# Altium PCB base_pcb.PcbDoc
Units mil, origin at the board's own origin, x right, y up, seen from the top; angles counter-clockwise.
Board outline 6000 x 4000 mil, 2 copper layers (Top Layer, Bottom Layer); 69 components, 58 nets, 229 pads, 0 vias.
Unrouted connection lines stored in the file: 110.
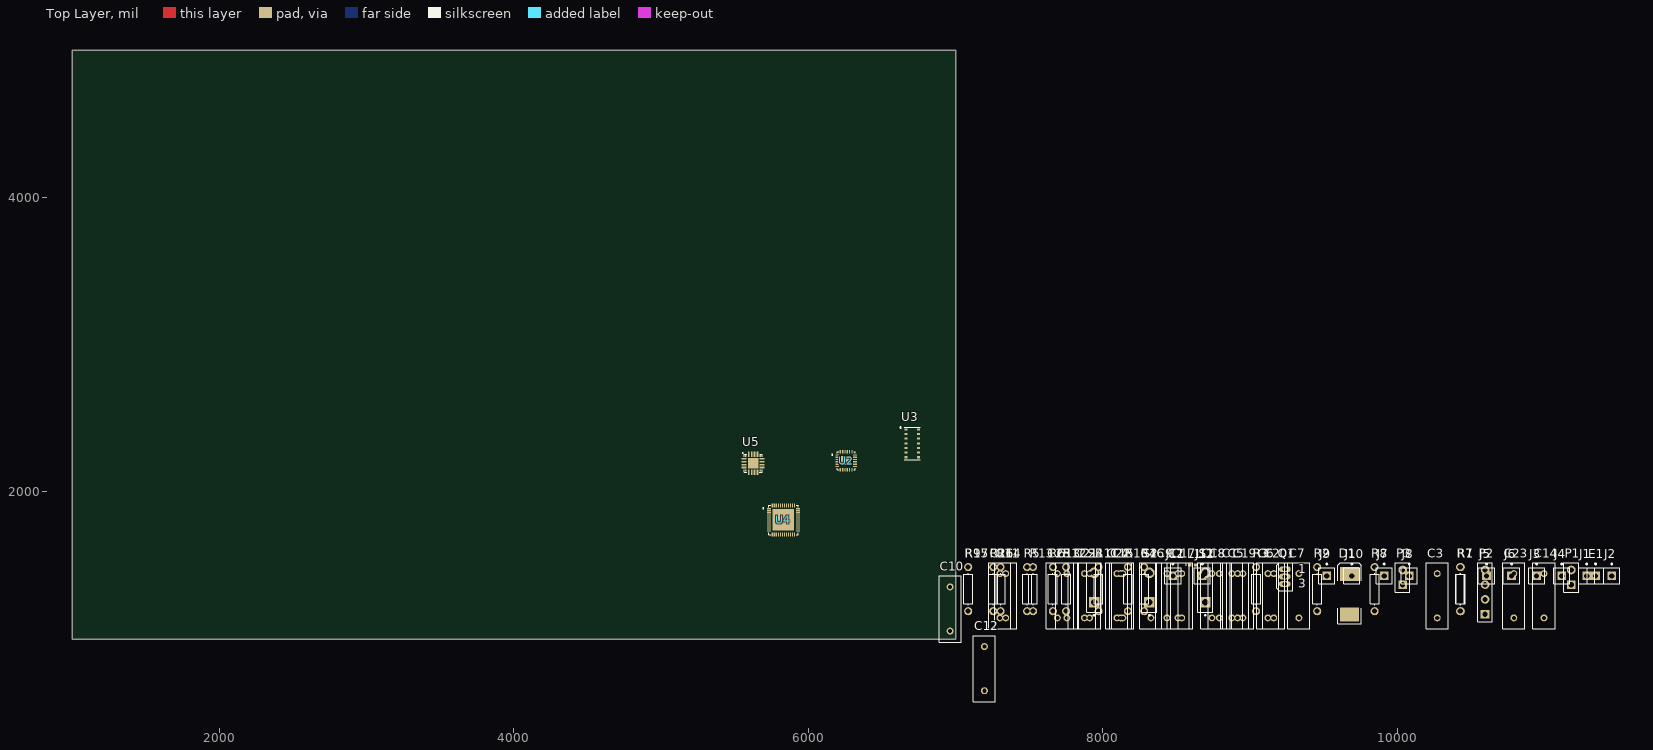
[diagram p0: Top Layer view]
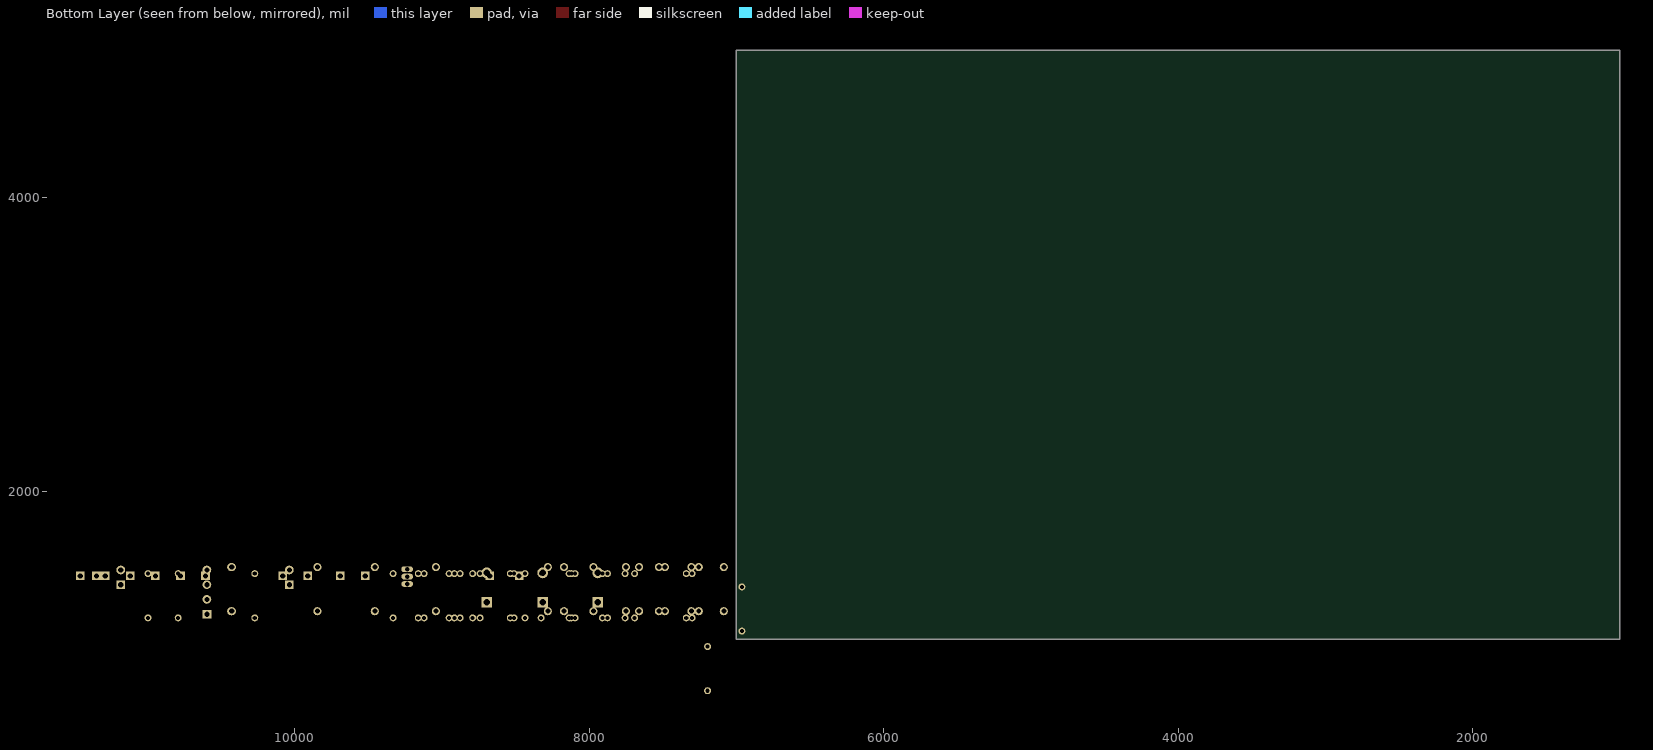
[diagram p1: Bottom Layer view, seen from below]

## Layer stack, top to bottom
Top Solder: solder mask 0.4, Solder Resist, Dk 3.5
Top Layer: signal copper 1.4
Dielectric 1: dielectric 12.6, FR-4, Dk 4.8
Bottom Layer: signal copper 1.4
Bottom Solder: solder mask 0.4, Solder Resist, Dk 3.5

## Board outline
1000,1000 7000,1000 7000,5000 1000,5000

## Design rules (kind name [scope] priority, off if disabled: settings)
Clearance [All] p1: gap=5 ignorepadtopadclearanceinfootprint=FALSE
PolygonConnect [All] p1: connectstyle=Relief reliefconductorwidth=10 reliefentries=4 polygonreliefangle="90 Angle" airgapwidth=10
RoutingVias [All] p1: holewidth=28 width=50 viastyle="Through Hole" minholewidth=28 minwidth=50 maxholewidth=28 maxwidth=50
SolderMaskExpansion [All] p1: expansion=4
Width [All] p1: maxlimit=1000 minlimit=8 preferedwidth=10
30 further rules are at their usual default settings.

## Classes and differential pairs
component class base_schematic: C1 C2 C3 C4 C5 C6 C7 C11 C12 C15 C17 C18 C20 C22 C23 C25 C26 D1 E1 J1 J2 J3 J4 J5 J6 J7 J8 J9 J10 J11 J12 L1 P1 P2 P3 Q1 R1 R2 R3 R4 R5 R6 R7 R8 R9 R12 R13 R14 R15 R16 R17 S1 S2 S3 U2 U3 U4 U5

## Components (designator, comment, footprint, x,y, rotation, side; value= is the part's Value field where it differs from the comment)
C1 "100nF" RAD-0.3 8875,1295 r90 top value=100pF
C2 "100nF" RAD-0.3 8510,1295 r90 top value=100pF
C3 "1uF" RAD-0.3 10270,1295 r90 top value=100pF
C4 "100nF" RAD-0.3 8135,1295 r90 top value=100pF
C5 "100nF" RAD-0.3 8915,1295 r90 top value=100pF
C6 "100nF" RAD-0.3 9120,1295 r90 top value=100pF
C7 "100nF" RAD-0.3 9330,1295 r90 top value=100pF
C8 "3.9pF" RAD-0.3 8790,1295 r90 top value=100pF
C9 "2.4pF" RAD-0.3 8435,1295 r90 top value=100pF
C10 "Cap" RAD-0.3 6962.31,1205 r90 top value=100pF
C11 "Cap" RAD-0.3 7340,1295 r90 top value=100pF
C12 "Cap" RAD-0.3 7195,800 r90 top value=100pF
C13 "Cap" RAD-0.3 7755,1295 r90 top value=100pF
C14 "10nF" RAD-0.3 10995,1295 r90 top value=100pF
C15 "1uF" RAD-0.3 8120,1295 r90 top value=100pF
C16 "100nF" RAD-0.3 8325,1295 r90 top value=100pF
C17 "100nF" RAD-0.3 8535,1295 r90 top value=100pF
C18 "100nF" RAD-0.3 8740,1295 r90 top value=100pF
C19 "100nF" RAD-0.3 8950,1295 r90 top value=100pF
C20 "1uF" RAD-0.3 9160,1295 r90 top value=100pF
C21 "10uF" RAD-0.3 7875,1295 r90 top value=100pF
C22 "1uF" RAD-0.3 8095,1295 r90 top value=100pF
C23 "3nF" RAD-0.3 10790,1295 r90 top value=100pF
C24 "270pF" RAD-0.3 7910,1295 r90 top value=100pF
C25 "270pF" RAD-0.3 7690,1295 r90 top value=100pF
C26 "1uF" RAD-0.3 7300,1295 r90 top value=100pF
D1 "Diode" SMC 9675,1305 r90 top
E1 "Antenna" PIN1 11345,1430 r0 top
J1 "Socket" PIN1 11285,1430 r0 top
J2 "Socket" PIN1 11455,1430 r0 top
J3 "Socket" PIN1 10945,1430 r0 top
J4 "Socket" PIN1 11115,1430 r0 top
J5 "Socket" PIN1 10605,1430 r0 top
J6 "Socket" PIN1 10775,1430 r0 top
J7 "Socket" PIN1 9910,1430 r0 top
J8 "Socket" PIN1 10080,1430 r0 top
J9 "Socket" PIN1 9520,1430 r0 top
J10 "Socket" PIN1 9690,1430 r0 top
J11 "Socket" PIN1 8475,1430 r0 top
J12 "Socket" PIN1 8675,1430 r0 top
L1 "2.7nH" 0402-A 8610,1505 r0 top value=10mH
P1 "Header 2" HDR1X2 11180,1370 r90 top
P2 "Header 4" HDR1X4 10595,1170 r90 top
P3 "Header 2" HDR1X2 10035,1370 r90 top
Q1 "MOSFET-N" E3 9235,1425 r0 top
R1 "10k" AXIAL-0.3 10430,1340 r90 top value=1K
R2 "1k" AXIAL-0.3 9455,1340 r90 top value=1K
R3 "10k" AXIAL-0.3 9040,1340 r90 top value=1K
R4 "1.5k" AXIAL-0.3 8280,1340 r90 top value=1K
R5 "1.5k" AXIAL-0.3 7485,1340 r90 top value=1K
R6 "1.5k" AXIAL-0.3 7660,1340 r90 top value=1K
R7 "20k" AXIAL-0.3 10425,1340 r90 top value=1K
R8 "10k" AXIAL-0.3 9845,1340 r90 top value=1K
R9 "10k" AXIAL-0.3 7085,1340 r90 top value=1K
R10 "100" AXIAL-0.3 8170,1340 r90 top value=1K
R11 "100" AXIAL-0.3 7970,1340 r90 top value=1K
R12 "100" AXIAL-0.3 7750,1340 r90 top value=1K
R13 "100" AXIAL-0.3 7525,1340 r90 top value=1K
R14 "100" AXIAL-0.3 7305,1340 r90 top value=1K
R15 "100" AXIAL-0.3 7085,1340 r90 top value=1K
R16 "10k" AXIAL-0.3 7255,1340 r90 top value=1K
R17 "100k" AXIAL-0.3 7085,1340 r90 top value=1K
S1 "SW-SPST" SPST-2 8695,1350 r90 top
S2 "SW-SPST" SPST-2 8315,1350 r90 top
S3 "SW-SPST" SPST-2 7940,1350 r90 top
U2 "ICM-20948" QFN40P300X300X105-25N 6255.83,2212.13 r0 top
U3 "MAX30100EFD+" LGA14R80P2X7_560X280X130 6705,2330 r0 top
U4 "ESP32-D2WD" QFN35P500X500X90-49N 5830,1810 r0 top
U5 "CP2102N-A01-GQFN20R" SILABS_QFN20 5623.98,2195.16 r0 top

## Footprints (in the part's own frame and the unit in brackets; to place one, negate y for a bottom-side part, rotate by r counter-clockwise, add the part's x,y. Pads: shape width x height; smd on the part's side, far side on the other; paste and mask are expansions set on the pad)
0402-A [mm] "Chip Inductor, Body 1.0x0.5mm, IPC High Density"
  rect 0.6x0.5 smd: 1(-0.5,0) 2(0.5,0)
  silkscreen extent -1.1,-0.15 -1.1,0.15, body extent -0.55,-0.3 0.55,0.3, height 0.55
AXIAL-0.3 [mm] "Axial Device, Thru-Hole; 2 Leads; 0.3 in Pin Spacing"
  round 1.4 hole 0.85: 1(-3.81,0) 2(3.81,0)
  silkscreen extent -2.77,-0.76 2.77,0.76
E3 [mm] "TO, Flat Index; 3 In-Line, Axial Leads; Body Dia. 4.6mm; Lead Dia. 0.5 mm (max)"
  oval 2x1 hole 0.8: 1(0,1.27) 2(0,0) 3(0,-1.27)
  silkscreen extent -1.41,-2.41 1.41,2.41
HDR1X2 [mm] "Connector; Header; 2 Position"
  rect 1.5x1.5 hole 0.9: 1(0,0)
  round 1.5 hole 0.9: 2(2.54,0)
  silkscreen extent -1.27,-1.27 3.81,1.27
HDR1X4 [mm] "Connector; Header; 4 Position"
  rect 1.5x1.5 hole 0.9: 1(0,0)
  round 1.5 hole 0.9: 2(2.54,0) 3(5.08,0) 4(7.62,0)
  silkscreen extent -1.27,-1.27 8.89,1.27
LGA14R80P2X7_560X280X130 [mm]
  rect 0.5x0.35 smd: 1(-1.075,2.4) 2(-1.075,1.6) 3(-1.075,0.8) 4(-1.075,0) 5(-1.075,-0.8) 6(-1.075,-1.6) 7(-1.075,-2.4) 8(1.075,-2.4) 9(1.075,-1.6) 10(1.075,-0.8) 11(1.075,0) 12(1.075,0.8) 13(1.075,1.6) 14(1.075,2.4)
  silkscreen extent -2.13,-2.8 1.4,2.83
PIN1 [mm] "Generic Antenna; 1 Lead"
  rect 1.5x1.5 hole 0.9: 1(0,0)
  silkscreen extent -1.4,-1.4 1.4,2.17
QFN35P500X500X90-49N [mm]
  rect 0.7x0.2 smd: 1(-2.49,1.925) 2(-2.49,1.575) 3(-2.49,1.225) 4(-2.49,0.875) 5(-2.49,0.525) 6(-2.49,0.175) 7(-2.49,-0.175) 8(-2.49,-0.525) 9(-2.49,-0.875) 10(-2.49,-1.225) 11(-2.49,-1.575) 12(-2.49,-1.925) 25(2.49,-1.925) 26(2.49,-1.575) 27(2.49,-1.225) 28(2.49,-0.875) 29(2.49,-0.525) 30(2.49,-0.175) 31(2.49,0.175) 32(2.49,0.525) 33(2.49,0.875) 34(2.49,1.225) 35(2.49,1.575) 36(2.49,1.925)
  rect 0.2x0.7 smd: 13(-1.925,-2.49) 14(-1.575,-2.49) 15(-1.225,-2.49) 16(-0.875,-2.49) 17(-0.525,-2.49) 18(-0.175,-2.49) 19(0.175,-2.49) 20(0.525,-2.49) 21(0.875,-2.49) 22(1.225,-2.49) 23(1.575,-2.49) 24(1.925,-2.49) 37(1.925,2.49) 38(1.575,2.49) 39(1.225,2.49) 40(0.875,2.49) 41(0.525,2.49) 42(0.175,2.49) 43(-0.175,2.49) 44(-0.525,2.49) 45(-0.875,2.49) 46(-1.225,2.49) 47(-1.575,2.49) 48(-1.925,2.49)
  rect 3.7x3.7 smd: 49(0,0)
  silkscreen extent -3.6,-2.53 2.53,2.53
QFN40P300X300X105-25N [mm]
  rect 0.64x0.22 smd: 1(-1.545,1) 2(-1.545,0.6) 3(-1.545,0.2) 4(-1.545,-0.2) 5(-1.545,-0.6) 6(-1.545,-1) 13(1.545,-1) 14(1.545,-0.6) 15(1.545,-0.2) 16(1.545,0.2) 17(1.545,0.6) 18(1.545,1)
  rect 0.22x0.64 smd: 7(-1,-1.545) 8(-0.6,-1.545) 9(-0.2,-1.545) 10(0.2,-1.545) 11(0.6,-1.545) 12(1,-1.545) 19(1,1.545) 20(0.6,1.545) 21(0.2,1.545) 22(-0.2,1.545) 23(-0.6,1.545) 24(-1,1.545)
  rect 1.7x1.54 smd: 25(0,0)
  silkscreen extent -2.5,-1.55 1.55,1.55
RAD-0.3 [mm] "Radial Cap, Thru-Hole; 2 Leads; 0.3 in Pin Spacing"
  round 1.2 hole 0.7: 1(-3.81,0) 2(3.81,0)
  silkscreen extent -5.71,-1.91 5.71,1.91
SILABS_QFN20 [mm]
  rect 0.3x0.3 smd: 1(-1.25,1.25) 6(-1.25,-1.25) 11(1.25,-1.25) 16(1.25,1.25)
  rect 0.9x0.3 smd: 2(-1.55,0.75) 3(-1.55,0.25) 4(-1.55,-0.25) 5(-1.55,-0.75) 12(1.55,-0.75) 13(1.55,-0.25) 14(1.55,0.25) 15(1.55,0.75)
  rect 0.3x0.9 smd: 7(-0.75,-1.55) 8(-0.25,-1.55) 9(0.25,-1.55) 10(0.75,-1.55) 17(0.75,1.55) 18(0.25,1.55) 19(-0.25,1.55) 20(-0.75,1.55)
  rect 1.8x1.8 smd: 21(0,0)
  silkscreen extent -1.85,-1.55 1.55,1.85
SMC [mm] "DO-214-AB/SMC; 2 C-Bend Leads; Body 7.9 x 5.9 mm, inc. leads (LxW)"
  rect 2.4x3.3 smd: 1(-3.475,0) 2(3.475,0)
  silkscreen extent -5.07,-2.05 5.43,2.05
SPST-2 [mm] "Switch; 2 Leads"
  rect 1.85x1.85 hole 1.1: 1(-2.54,0)
  round 1.85 hole 1.1: 2(2.54,0)
  silkscreen extent -4.89,-1.27 4.28,1.27

## Part data
C1 C2 C3 C4 C5 C6 C7 C8 C9 C14 C15 C16 C17 C18 C19 C20 C21 C22 C23 C24 C25 C26: library part Cap, "Capacitor", LatestRevisionDate=17-Jul-2002, LatestRevisionNote="Re-released for DXP Platform.", PackageDescription="Radial Cap, Thru-Hole; 2 Leads; 0.3 in Pin Spacing", PackageReference=RAD-0.3, Published=8-Jun-2000, Publisher="Altium Limited"
C10 C11 C12 C13: "Capacitor", LatestRevisionDate=17-Jul-2002, LatestRevisionNote="Re-released for DXP Platform.", PackageDescription="Radial Cap, Thru-Hole; 2 Leads; 0.3 in Pin Spacing", PackageReference=RAD-0.3, Published=8-Jun-2000, Publisher="Altium Limited"
D1: "Default Diode", Code_JEDEC=DO-214-AB, LatestRevisionDate=17-Jul-2002, LatestRevisionNote="Re-released for DXP Platform.", PackageDescription="DO-214-AB/SMC; 2 C-Bend Leads; Body 7.9 x 5.9 mm, inc. leads (LxW)", PackageReference=SMC, PackageVersion=Sep-1996, Published=8-Jun-2000, Publisher="Altium Limited"
E1: "Generic Antenna", LatestRevisionDate=17-Jul-2002, LatestRevisionNote="Re-released for DXP Platform.", PackageReference=PIN1, Published=24-Mar-1999, Publisher="Altium Limited"
L1: library part Inductor, "Inductor", Code_IEC=1005, Code_JEITA=0402, LatestRevisionDate=29-May-2009, LatestRevisionNote="IPC-7351 Footprint Added.", PackageDescription="Chip Inductor", PackageReference=0402-A, Published=8-Jun-2000, Publisher="Altium Limited"
P1 P3: "Header, 2-Pin", LatestRevisionDate=17-Jul-2002, LatestRevisionNote="Re-released for DXP Platform.", Publisher="Altium Limited"
P2: "Header, 4-Pin", LatestRevisionDate=17-Jul-2002, LatestRevisionNote="Re-released for DXP Platform.", Publisher="Altium Limited"
Q1: "N-Channel MOSFET", LatestRevisionDate=17-Jul-2002, LatestRevisionNote="Re-released for DXP Platform.", PackageDescription="TO, Flat Index; 3 In-Line, Axial Leads; Body Dia. 4.6mm; Lead Dia. 0.5 mm (max)", PackageReference=E3, PackageVersion=1995/1996, Published=8-Jun-2000, Publisher="Altium Limited"
R1 R2 R3 R4 R5 R6 R7 R8 R9 R10 R11 R12 R13 R14 R15 R16 R17: library part Res1, "Resistor", LatestRevisionDate=17-Jul-2002, LatestRevisionNote="Re-released for DXP Platform.", PackageDescription="Axial Device, Thru-Hole; 2 Leads; 0.3 in Pin Spacing", PackageReference=AXIAL-0.3, Published=8-Jun-2000, Publisher="Altium Limited"
S1 S2 S3: "Single-Pole, Single-Throw Switch", LatestRevisionDate=17-Jul-2002, LatestRevisionNote="Re-released for DXP Platform.", PackageDescription="Switch; 2 Leads", PackageReference=SPST-2, Published=24-Mar-1999, Publisher="Altium Limited"
U2: "9 Axis=3 Axis Gyro+3 Axis Accel+Compass. Pin For Pin With m", Package="QFN-24 InvenSense", Availability=Unavailable, MF="TDK InvenSense", MP=ICM-20948, Price=None, SnapEDA_Link=https://www.snapeda.com/parts/ICM-20948/TDK%20InvenSense/view-part/?ref=snap
U3: "Pulse Oximeter and Heart-Rate Sensor IC 14-Pin OLGA T/R", Package=None, Availability=Unavailable, MF="Maxim Integrated", MP=MAX30100EFD+T, Price=None, SnapEDA_Link=https://www.snapeda.com/parts/MAX30100EFD%2BT/Maxim%20Integrated/view-part/?ref=snap
U4: "Smd Ic Esp32-D2wd, Dual Core Mcu", Package="VFQFN-48 Espressif Systems", Availability=Unavailable, Datasheet=https://dl.espressif.com/dl/schematics/ESP-WROOM-32-v3.2_sch.pdf, MF="Espressif Systems", MP=ESP32-D2WD, Price=None, SnapEDA_Link=https://www.snapeda.com/parts/ESP32-D2WD/Espressif%20Systems/view-part/?ref=snap
U5: "Ic Bridge Usb To Uart 20qfn", Package="QFN-20 Silicon Labs", Availability=Unavailable, MF="Silicon Labs", MP=CP2102N-A01-GQFN20R, Price=None, SnapEDA_Link=https://www.snapeda.com/parts/CP2102N-A01-GQFN20R/Silicon%20Labs/view-part/?ref=snap
J1 J2 J3 J4 J5 J6 J7 J8 J9 J10 J11 J12: LatestRevisionDate=17-Jul-2002, LatestRevisionNote="Re-released for DXP Platform.", Publisher="Altium Limited"

## Nets (pads, with @x,y where several pads share a name; then routed paths per layer and width w, separated by ;. In a path a pad name is that pad's centre, name@x,y a point inside that pad or via, vN(x,y) a via of type N, cw(c..) or ccw(c..) an arc to the next point about the centre after c; other vN are vias at no path point)
5V_USB: P2.1 R9.2 U5.7 U5.8
ACCEL_WAKEUP: U2.12
BAT_STAT: 
BTN0: C1.2 S1.2
BTN1: C2.2 S2.2
BTN2: C4.2 S3.2
D+: P2.3 U5.4
D-: P2.2 U5.5
EXT_C\S\: J10.1
EXT_MISO: J4.1
EXT_MOSI: J6.1
EXT_SCL: J8.1
GND: C1.1 C2.1 C3.1 C4.1 C5.1 C6.1 C7.1 C9.1 C10.1 C11.1 C12.1 C13.1 C14.2 C15.1 C16.1 C17.1 C18.1 C19.1 C20.1 C21.1 C22.1 C26.1 J11.1 J12.1 L1.1 P1.2 P2.4 Q1.3 R1.2 R3.1 R17.1 S1.1 S2.1 S3.1 U2.9 U2.11 U2.18 U2.20 U2.25 U3.4 U3.12 U4.49 U5.3 U5.12 U5.21
NetC5_2: C5.2 U2.10
NetC8_1: C8.1 C9.2 E1.1
NetC14_1: C14.1 C23.1 R7.1 U4.48
NetC23_2: C23.2 R7.2 U4.47
NetC24_1: C24.1 U4.6
NetC24_2: C24.2 U4.5
NetC25_1: C25.1 U4.8
NetC25_2: C25.2 U4.7
NetC26_2: C26.2 U5.6
NetQ1_2: Q1.2 R2.2 R3.2
NetR1_1: R1.1
NetR8_2: R8.2 U4.9
NetR9_1: R9.1 U5.9
NetR10_1: R10.1
NetR11_1: R11.1
NetR12_1: R12.1
NetR13_1: R13.1
NetR14_1: R14.1
NetR15_1: R15.1
OXI_INT: R4.1 U3.13
RF_I/O: C8.2 L1.2 U4.2
RGB_A_0: 
RGB_A_1: 
RGB_B: R12.2 R15.2
RGB_G: R11.2 R14.2
RGB_R: R10.2 R13.2
SCL: R5.1 U2.23 U3.2
SDA: R6.1 U2.24 U3.3
SENSE_VBAT: R16.1 R17.2
STRP_C\S\: J9.1
STRP_MISO: J3.1
STRP_MOSI: J5.1
STRP_SCL: J7.1
UART_RX: U5.17
UART_TX: U5.18
Vbat: C3.2 D1.2 P1.1 P3.1 R16.2
VDD18: C6.2 C7.2 C22.2 R4.2 R5.2 R6.2 U2.8 U2.13 U2.22 U3.11
VDD33: C16.2 C17.2 C18.2 C19.2 C20.2 C21.2 J1.1 J2.1 R8.1 U3.9 U3.10 U4.1 U4.3 U4.4 U4.19 U4.37 U4.43 U4.46
VDDSDIO: C15.2 U4.26
VIBRO: R2.1
VIBRO_OUT: D1.1 P3.2 Q1.1
XTAL_HF_0: C10.2 U4.44
XTAL_HF_1: C11.2 U4.45
XTAL_LF_0: C12.2 U4.12
XTAL_LF_1: C13.2 U4.13
pads on no net: U2.1 U2.2 U2.3 U2.4 U2.5 U2.6 U2.7 U2.14 U2.15 U2.16 U2.17 U2.19 U2.21 U3.1 U3.5 U3.6 U3.7 U3.8 U3.14 U4.10 U4.11 U4.14 U4.15 U4.16 U4.17 U4.18 U4.20 U4.21 U4.22 U4.23 U4.24 U4.25 U4.27 U4.28 U4.29 U4.30 U4.31 U4.32 U4.33 U4.34 U4.35 U4.36 U4.38 U4.39 U4.40 U4.41 U4.42 U5.1 U5.2 U5.10 U5.11 U5.13 U5.14 U5.15 U5.16 U5.19 U5.20

## Text inside footprints (layer, text, board x,y; h text height)
Q1: Top Overlay "3" at 9324.57,1347.72 h59.05; Top Overlay "1" at 9324.57,1446.85 h59.05